# Altium PCB 剥皮器20200614.PCBDOC (part 1 of 2)
Units mil, origin at the board's own origin, x right, y up, seen from the top; angles counter-clockwise.
Board outline 5515.78 x 3626.02 mil, 4 copper layers (Top Layer, MidLayer1, MidLayer2, Bottom Layer); 100 components, 73 nets, 328 pads, 459 vias.
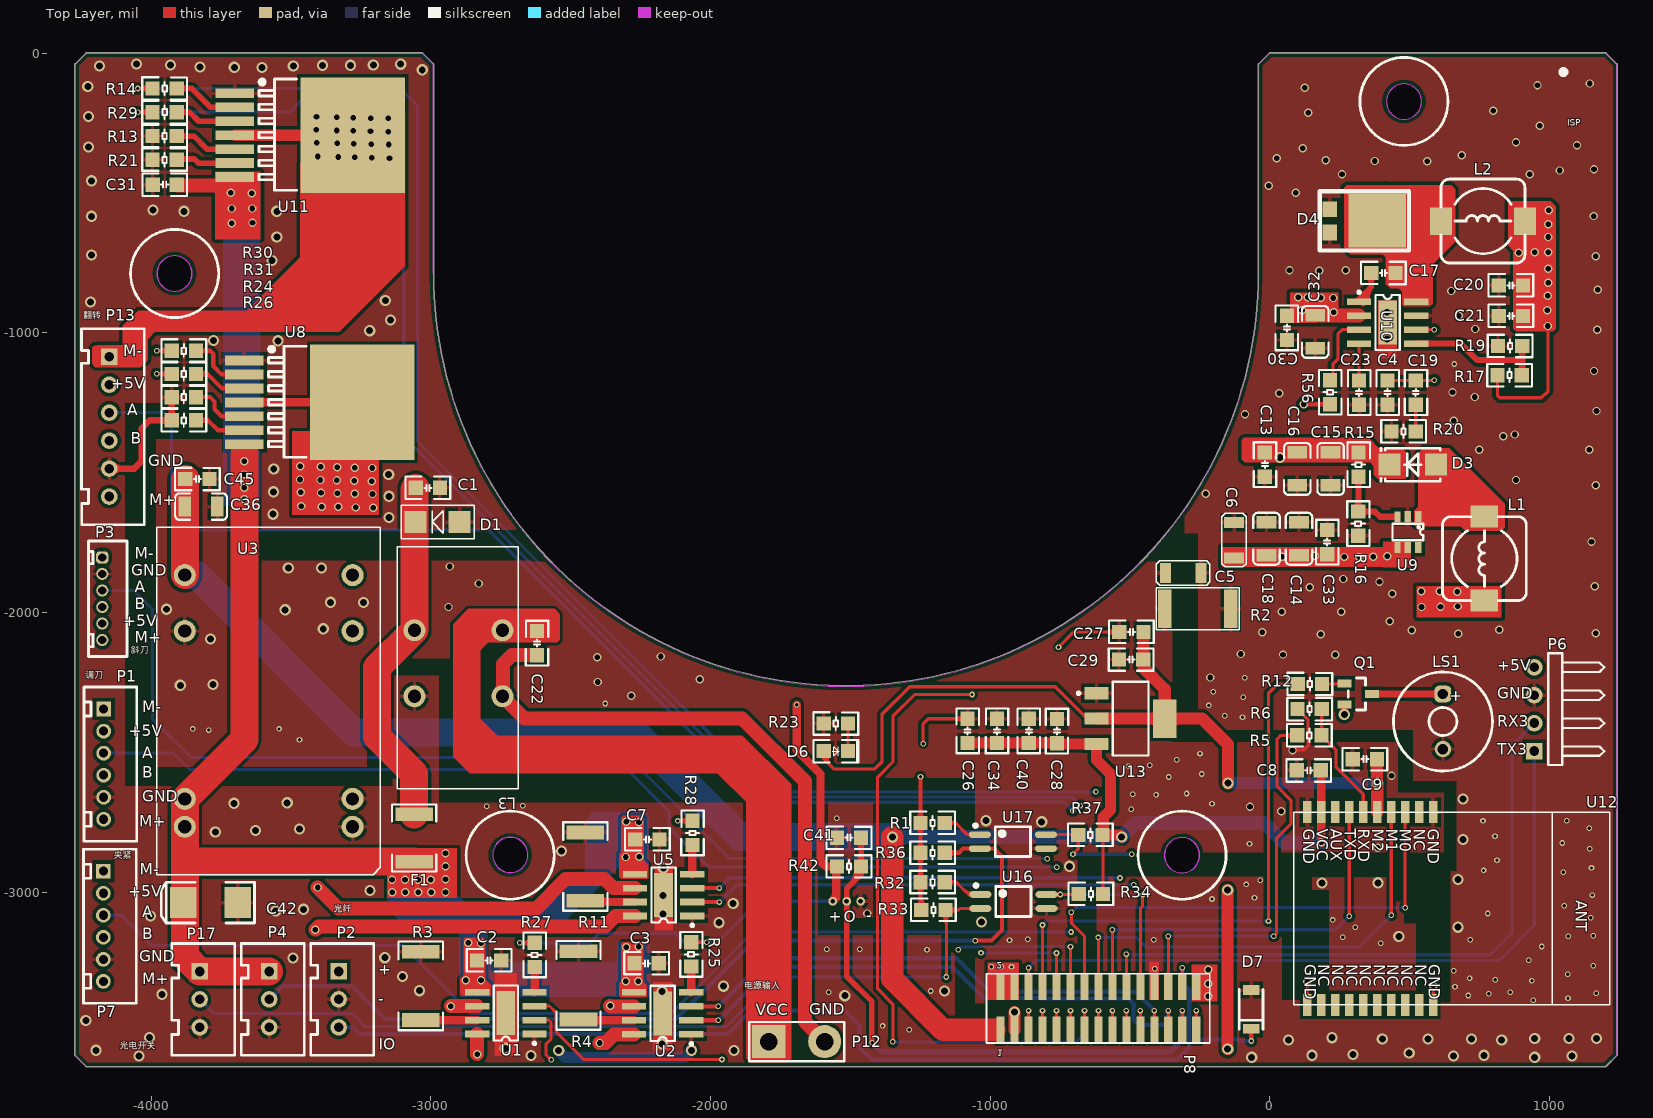
[diagram p0: Top Layer view]
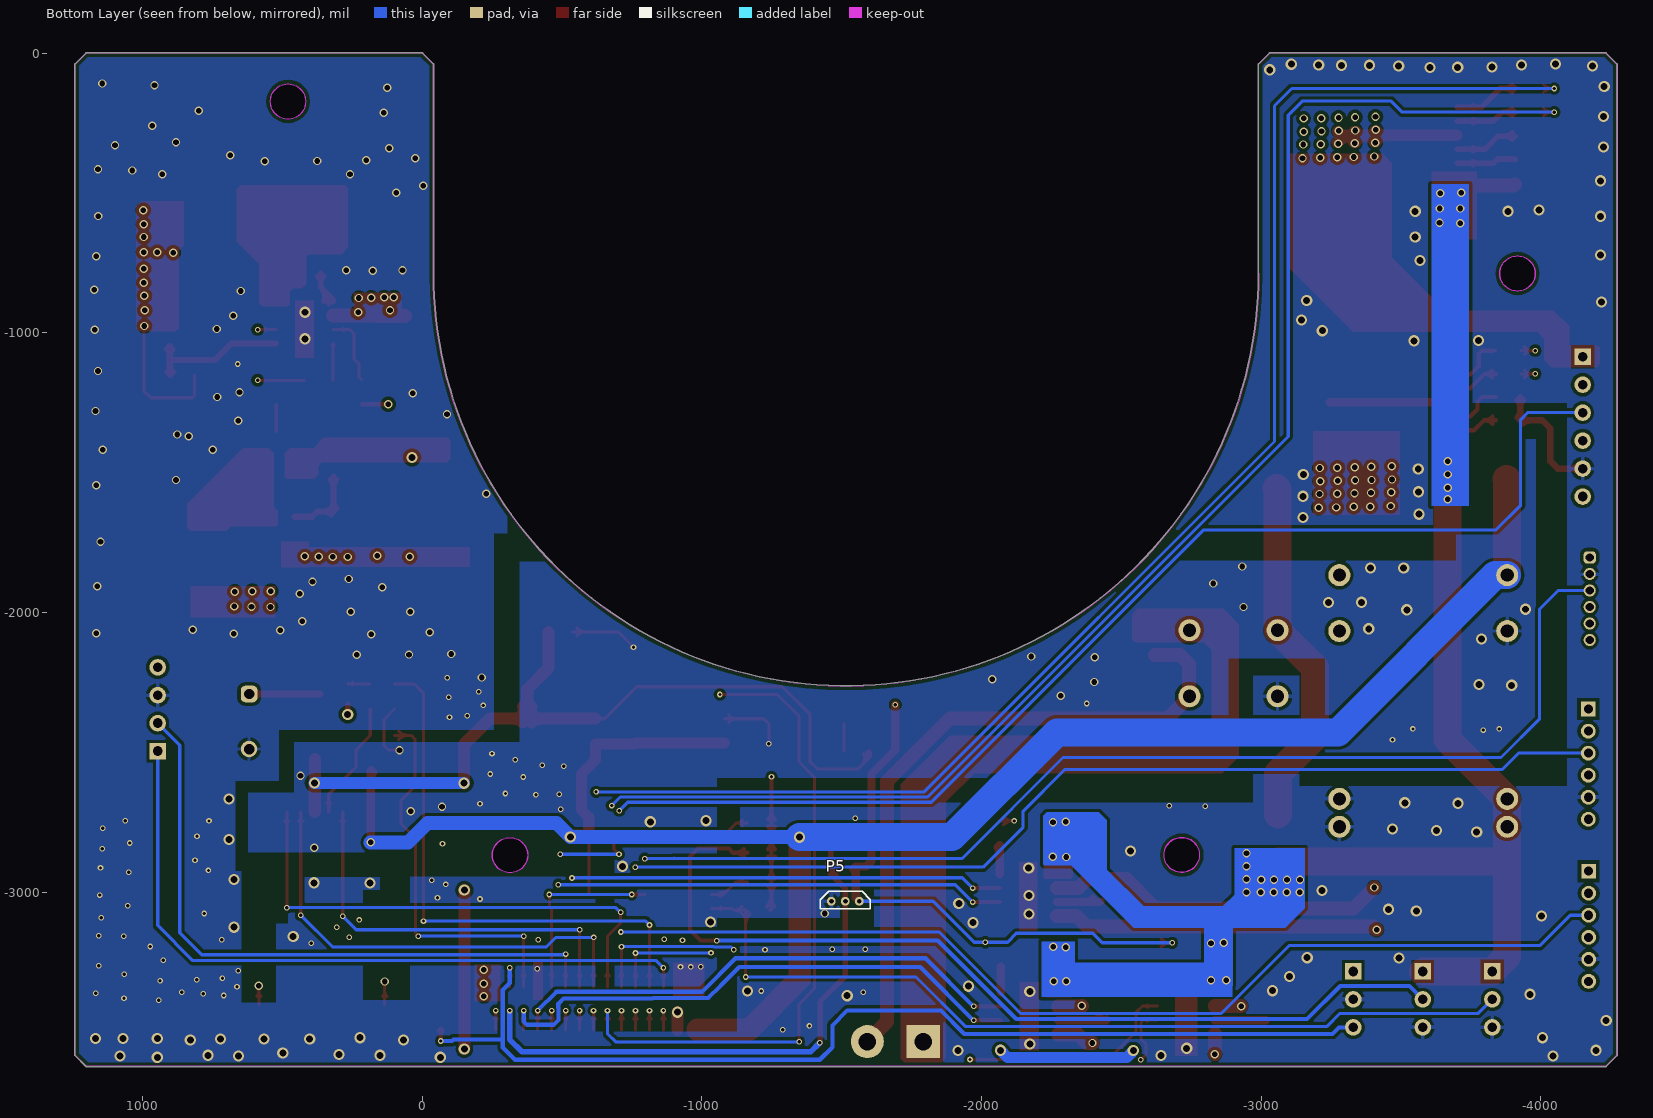
[diagram p1: Bottom Layer view, seen from below]
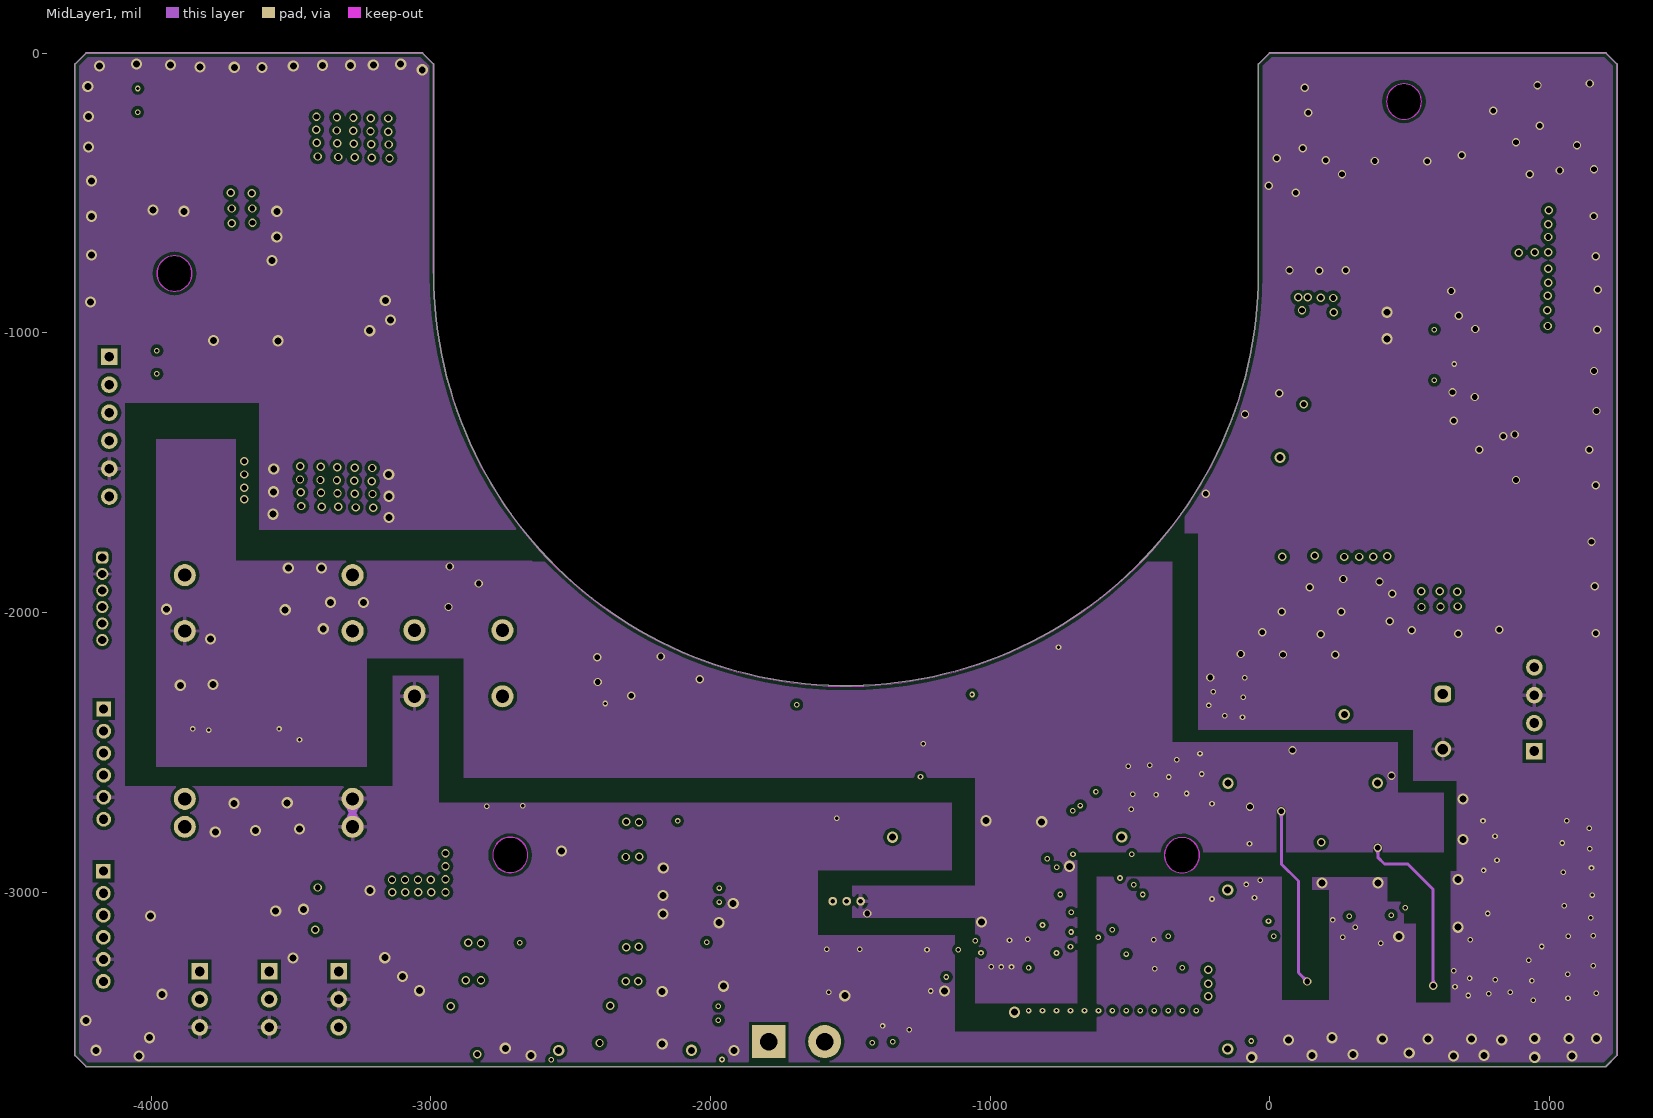
[diagram p2: MidLayer1]
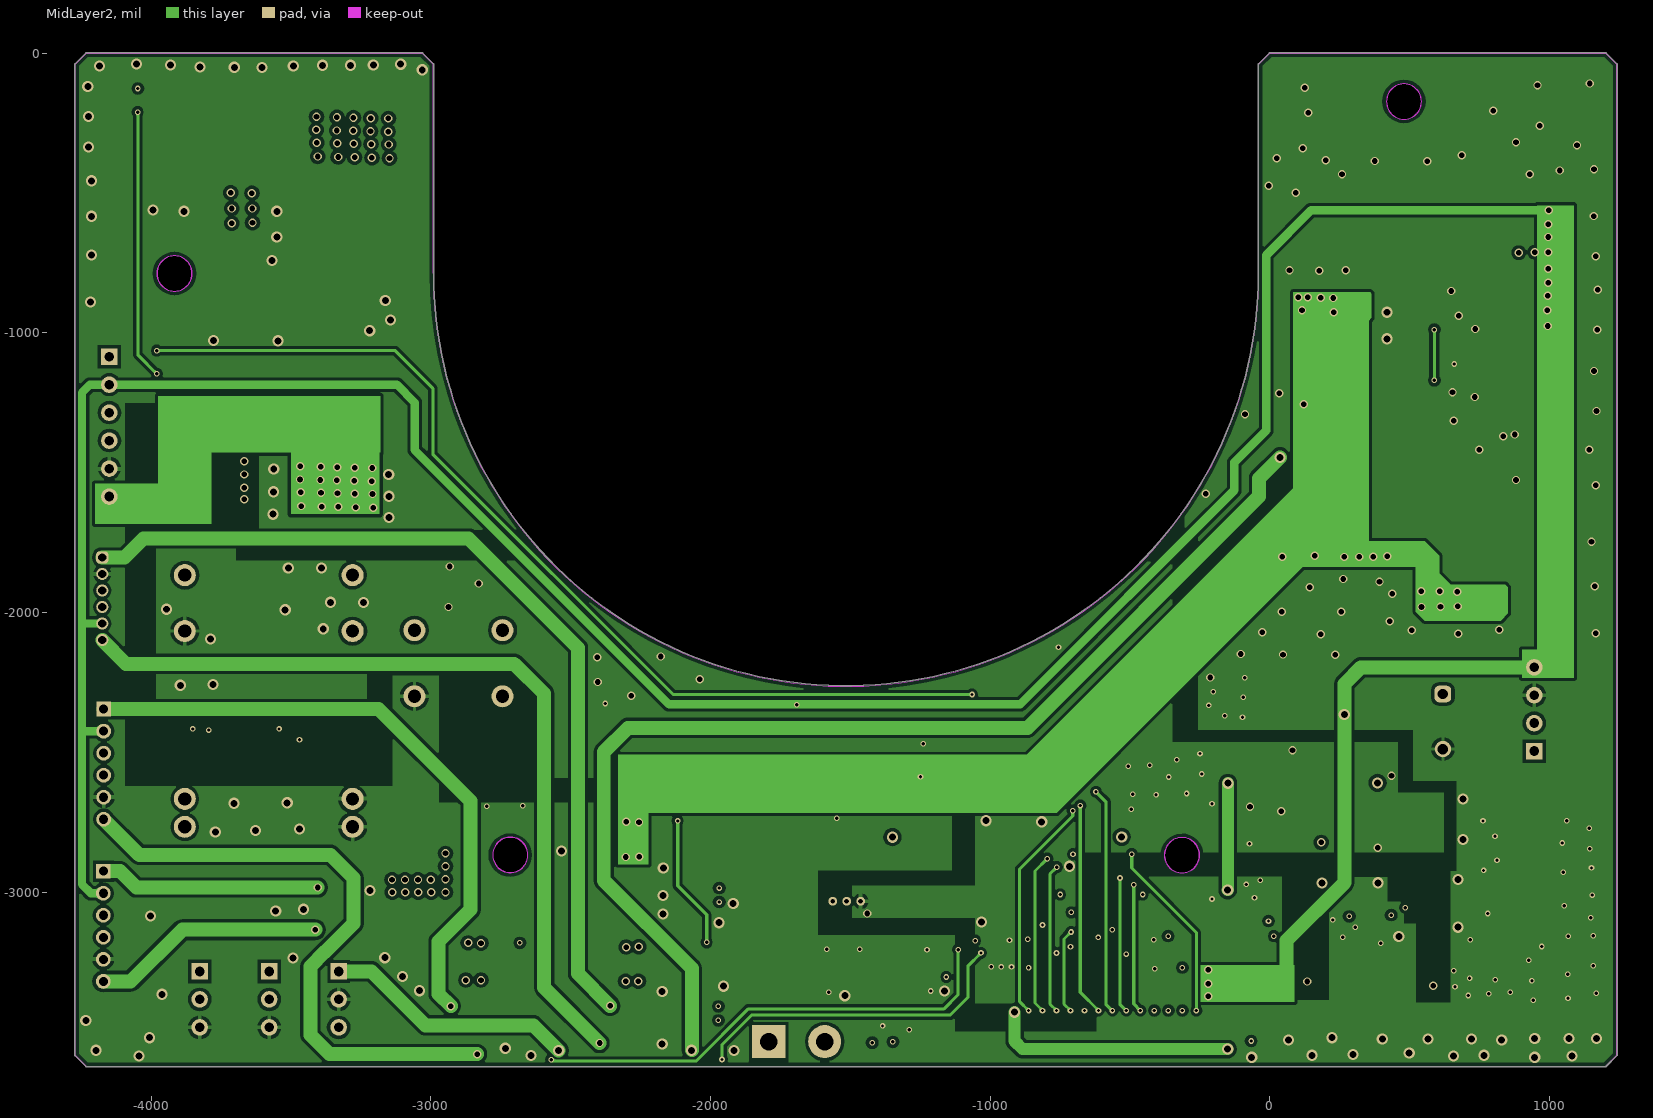
[diagram p3: MidLayer2]

## Layer stack, top to bottom
Top Layer: signal copper 1.4
Dielectric: core 12.6, FR-4, Dk 4.8
MidLayer1: signal copper 1.4
Dielectric: prepreg 12.6, FR-4, Dk 4.8
MidLayer2: signal copper 1.4
Dielectric: core 12.6, FR-4, Dk 4.8
Bottom Layer: signal copper 1.4

## Board outline
-4273.06,-3584.08 -4233.69,-3623.45 -4233.7,-3623.44 ccw(c-4232.29,-3622.05) -4232.29,-3624.03 1200.79,-3624.03 ccw(c1200.79,-3622.05) 1202.77,-3622.2 1241.56,-3583.4 1241.55,-3583.41 ccw(c1240.16,-3582) 1242.14,-3582 1242.14,-39.37 ccw(c1240.16,-39.37) 1241.55,-37.96 1241.56,-37.97 1202.19,1.4 1202.2,1.39 ccw(c1200.79,0) 1200.79,1.98 0,1.98 ccw(c0,0) -1.41,1.39 -1.4,1.4 -40.77,-37.97 -40.76,-37.96 ccw(c-39.37,-39.37) -41.35,-39.37 -41.35,-787.4 ccw(c-39.37,-787.4) -41.35,-787.42 cw(c-1515.75,-787.4) -2990.14,-787.4 -2990.14,-39.37 ccw(c-2992.13,-39.37) -2990.74,-37.96 -2990.73,-37.97 -3030.1,1.4 -3030.08,1.39 ccw(c-3031.5,0) -3031.5,1.98 -4232.29,1.98 ccw(c-4232.29,0) -4233.7,1.39 -4233.69,1.4 -4273.06,-37.97 -4273.05,-37.96 ccw(c-4271.66,-39.37) -4273.64,-39.37 -4273.64,-3582.68 ccw(c-4271.66,-3582.68)
cut-out: -376.97,-2867.23 ccw(c-313.98,-2867.23) -313.98,-2930.22 ccw(c-313.98,-2867.23) -250.98,-2867.23 ccw(c-313.98,-2867.23) -313.98,-2804.24 ccw(c-313.98,-2867.23)
cut-out: -3979.33,-787.4 ccw(c-3916.34,-787.4) -3916.34,-850.39 ccw(c-3916.34,-787.4) -3853.35,-787.4 ccw(c-3916.34,-787.4) -3916.34,-724.41 ccw(c-3916.34,-787.4)
cut-out: 416.56,-172.69 ccw(c479.55,-172.69) 479.55,-235.69 ccw(c479.55,-172.69) 542.55,-172.69 ccw(c479.55,-172.69) 479.55,-109.7 ccw(c479.55,-172.69)
cut-out: -2779.17,-2865.69 ccw(c-2716.17,-2865.69) -2716.17,-2928.68 ccw(c-2716.17,-2865.69) -2653.18,-2865.69 ccw(c-2716.17,-2865.69) -2716.17,-2802.7 ccw(c-2716.17,-2865.69)

## Design rules (kind name [scope] priority, off if disabled: settings)
Clearance Clearance_1 [InPolygon] p1: gap=12
Clearance [All] p2: gap=7.09
FabricationTestPointUsage TestPointUsage [All] p1: valid=0 allowmultiple=FALSE
FabricationTestpoint Testpoint [All] p1: side=3 testpointundercomponent=TRUE minsize=40 maxsize=100 preferedsize=60 minholesize=0 maxholesize=40 preferedholesize=32 testpointgrid=1 allowsidetop=TRUE allowsidebottom=TRUE usegrid=TRUE gridtolerance=0.01
PolygonConnect PolygonConnect_1 [IsVia] p1: connectstyle=Direct reliefconductorwidth=10 reliefentries=4 polygonreliefangle="90 Angle"
PolygonConnect [All] p2: connectstyle=Relief reliefconductorwidth=13.78 reliefentries=4 polygonreliefangle="90 Angle"
RoutingVias [All] p1: holewidth=28 width=50 viastyle="Through Hole" minholewidth=28 minwidth=50 maxholewidth=28 maxwidth=50
SilkscreenOverComponentPads [All] p1: minsilkscreentomaskgap=10
SolderMaskExpansion [All] p1: expansion=4
Width [All] p1: maxlimit=393.7 minlimit=3.94 preferedwidth=11.02
25 further rules are at their usual default settings.

## Components (designator, comment, footprint, x,y, rotation, side; value= is the part's Value field where it differs from the comment)
C1 "2.2uF/25V" 0805-C -3011,-1554 r0 top
C2 "104" 0805-C -2792,-3244 r0 top
C3 "104" 0805-C -2229,-3254 r0 top
C4 "22pF" 0805-C 420.69,-1213 r270 top
C5 "10nF/2KV" 1206C -374,-1858 r0 top
C6 "22uF/25V" 1206C -128,-1805 r90 top
C7 "104" 0805-C -2226,-2811 r0 top
C8 "104" 0805-C 139,-2564 r180 top
C9 "104" 0805-C 340,-2524 r180 top
C13 "104" 0805-C -18,-1471 r270 top
C14 "22uF/25V" 1206-C 104,-1736 r90 top
C15 "22uF/25V" 1206-C 217,-1486 r270 top
C16 "22uF/25V" 1206-C 98,-1486 r270 top
C17 "104" 0805-C 406,-786 r0 top
C18 "22uF/25V" 1206-C -12,-1736 r90 top
C19 "1.2nF" 0805-C 521.69,-1213 r270 top
C20 "47uF" 0805-C 862,-830 r0 top
C21 "47uF" 0805-C 862,-939 r0 top
C22 "2.2uF/25V" 0805-C -2621,-2109 r270 top
C23 "8.2nF" 0805-C 319,-1213 r270 top
C26 "47uF" 0805-C -1081,-2423 r270 top
C27 "47uF" 0805-C -495,-2069 r0 top
C28 "104" 0805-C -761,-2424 r90 top
C29 "104" 0805-C -496.43,-2167.63 r180 top
C30 "104" 0805-C 61,-982 r90 top
C31 "104" 0805-C -3951.8,-469.69 r180 top
C32 "22uF/25V" 1206-C 162,-996 r270 top
C33 "104" 0805-C 205,-1748 r270 top
C34 "47uF" 0805-C -976,-2423 r270 top
C36 "22uF/25V" 1206-C -3822,-1621 r0 top
C40 "104" 0805-C -862,-2423 r90 top
C41 "104" 0805-C -1505,-2805 r180 top
C42 "100uF" LC-CASE-C_6032 -3788.29,-3037.01 r180 top
C45 "104" 0805-C -3835,-1522 r180 top
D1 "SMAJ24CA" sma -2897,-1676 r180 top
D3 "SS34" "SMA - JW" 511,-1471 r0 top
D4 "SB1045L" TO-277 289.81,-599.07 r180 top
D6 "红色" 0805-LED -1552.28,-2495.18 r180 top
D7 "5.1V" LC-LL-34 -67,-3419 r90 top
F1 "1812 5A" LC-1812_R -3060,-2806 r90 top
L1 "4.7uH" 7*7*4电感 767,-1807 r90 top
L2 "6.8uh" 7*7*4电感 762,-600 r0 top
L3 "T22148" T181007 -2744,-2063 r270 top
LS1 "5V蜂鸣器" 蜂鸣器0905 618.82,-2389.46 r270 top
P1 "PH2.0-6PIN" PH2.0-6PIN -4169.99,-2542.12 r270 top
P2 "XH2.54-3PIN直" XH2.54-3PINֱ -3329.71,-3383.07 r270 top
P3 "ZH1.5-6PIN" ZH1.5-6PIN -4175.19,-1950.4 r270 top
P4 "XH2.54-3PIN直" XH2.54-3PINֱ -3578.2,-3383.07 r270 top
P5 "NC" 2SS52M -1463.19,-3032.07 r180 bottom locked
P6 "2.54弯单排针" HDR1X4H 945.35,-2495.46 r90 top
P7 "PH2.0-6PIN" PH2.0-6PIN -4171.51,-3121.6 r270 top
P8 "Header 15X2" SIP15-1.27 -613.19,-3415.07 r0 top locked
P12 "焊孔2MM" HDR1X2 -1792,-3534 r0 top
P13 "XH2.54-6PIN直" XH2.54-6PINֱ -4149.91,-1335.07 r270 top
P17 "XH2.54-3PIN直" XH2.54-3PINֱ -3826.69,-3383.07 r270 top
Q1 "S8550" SOT--23 315.81,-2291.07 r180 top
R1 "2K" 0805-R#1 -1206,-2752 r0 top
R2 "1M" 2512R -376,-1986 r0 top
R3 "0.1R 1%" 2512-R -3036.31,-3335 r270 top
R4 "0.35R 1%" 2512-R -2472.31,-3333 r270 top
R5 "2K" 0805-R#2 141,-2439 r180 top
R6 "3.3K" 0805-R#2 142,-2345 r0 top
R11 "0.1R 1%" 2512-R -2448,-2908 r270 top
R12 "2K" 0805-R#1 142.81,-2255.07 r180 top
R13 "1K" 0805-R#2 -3952.18,-296.01 r180 top
R14 "1K" 0805-R#1 -3952.18,-125.69 r180 top
R15 "30K" 0805-R#1 317,-1471 r270 top
R16 "1.2K" 0805-R#1 316,-1682 r270 top
R17 "10.2K" 0805-R#1 857,-1151 r180 top
R19 "2K" 0805-R#1 859,-1047 r0 top
R20 "44.2K" 0805-R#1 478,-1352 r0 top
R21 "1K" 0805-R#1 -3952.18,-380.69 r0 top
R23 "330R" 0805-R#1 -1552.28,-2396.18 r180 top
R24 "1K" 0805-R#2 -3883.61,-1229.5 r180 top
R25 "10K" 0805-R#1 -2069,-3222 r270 top
R26 "1K" 0805-R#1 -3883.61,-1312.5 r0 top
R27 "10K" 0805-R#1 -2629,-3224 r270 top
R28 "10K" 0805-R#1 -2065,-2788 r270 top
R29 "1K" 0805-R#2 -3952.18,-210.38 r0 top
R30 "1K" 0805-R#2 -3883.61,-1063.5 r180 top
R31 "1K" 0805-R#2 -3883.61,-1146.5 r180 top
R32 "2K" 0805-R#2 -1206,-2964 r180 top
R33 "10K" 0805-R#2 -1203,-3063 r180 top
R34 "10K" 0805-R#2 -640,-3006 r180 top
R36 "10K" 0805-R#2 -1206,-2859 r180 top
R37 "10K" 0805-R#2 -642,-2795 r180 top
R42 "10K" 0805-R#2 -1505,-2908 r180 top
R56 "10K" 0805-R#2 215,-1212 r90 top
U1 "DRV8872" SOP-8带散热#1 -2732.31,-3432 r90 top
U2 "DRV8872" SOP-8带散热#1 -2171.31,-3433 r90 top
U3 "URF2405P-6WR3" URF2405P-6WR3 -3880,-1866 r90 top
U5 "DRV8872" SOP-8带散热#1 -2168,-3010 r90 top
U8 "BTS7960" LC-TO-263-7 -3667,-1248 r180 top
U9 "SX1308" SOT-23-6 493,-1712 r180 top
U10 "TPS54531" SOP-8带散热#2 421,-963 r270 top
U11 "BTS7960" LC-TO-263-7 -3701,-293 r180 top
U12 "E28-2G4T12S" E28-2G4T12S 358.81,-3058.07 r270 top locked
U13 "AMS1117-3.3" SOT--223 -498,-2379 r180 top
U16 "IS281GB" LC-SOP-4_P1.27 -917,-3033 r0 top
U17 "IS281GB" LC-SOP-4_P1.27 -919,-2819 r0 top

## Footprints (in the part's own frame and the unit in brackets; to place one, negate y for a bottom-side part, rotate by r counter-clockwise, add the part's x,y. Pads: shape width x height; smd on the part's side, far side on the other; paste and mask are expansions set on the pad)
2SS52M [mm]
  round 0.8 hole 0.45: 1(0,0) 2(1.27,0) 3(2.54,0)
  silkscreen extent -0.99,-0.69 3.53,0.88
7*7*4电感 [mm] "7*7*4电感"
  rect 2x2.5 smd: 1(-3.81,0) 2(3.81,0)
  silkscreen extent -3.81,-3.81 3.81,3.81, body extent -3.65,-3.65 3.65,3.65, height 3.65
0805-C [mil] "0805贴片电容"
  rect 51x51 smd: 1(-43.31,0) 2(43.31,0)
  silkscreen extent -80,-40 80,41
0805-LED [mil] "0805LED"
  rect 51x51 smd: 1(43.31,0) 2(-43.31,0)
  silkscreen extent -81,-41 80,41
0805-R#1 [mil] "0805电阻"
  rect 51x51 smd: 1(-43.31,0) 2(43.31,0)
  silkscreen extent -80,-40 80,41
0805-R#2 [mil] "0805电阻"
  rect 51x51 smd: 1(43.31,0) 2(-43.31,0)
  silkscreen extent -80,-41 80,40
1206-C [mm]
  rect 1.13x1.8 smd: 1(-1.49,0) 2(1.49,0)
  silkscreen extent -2.36,-1.2 2.35,1.2, body extent -1.6,-0.81 1.6,0.79, height 1
1206C [mm]
  rect 1x1.8 smd: 1(0,0) 2(3.25,0)
  silkscreen extent -0.8,-1.1 4.05,1.1
2512-R [mm] "2512-R"
  rect 1.25x3.42 smd: 1(-3.1,0) 2(3.1,0)
  silkscreen extent -4.03,-2.01 4.02,2.01, body extent -3.16,-1.6 3.16,1.6, height 0.62
2512R [mm]
  rect 1.2x3.5 smd: 1(0,0) 2(6,0)
  silkscreen extent -0.75,-1.9 6.75,1.9
E28-2G4T12S [mm]
  rect 2x0.8 smd: 1(-8.75,5.715) 2(-8.75,4.445) 3(-8.75,3.175) 4(-8.75,1.905) 5(-8.75,0.635) 6(-8.75,-0.635) 7(-8.75,-1.905) 8(-8.75,-3.175) 9(-8.75,-4.445) 10(-8.75,-5.715) 11(8.75,-5.715) 12(8.75,-4.445) 13(8.75,-3.175) 14(8.75,-1.905) 15(8.75,-0.635) 16(8.75,0.635) 17(8.75,1.905) 18(8.75,3.175) 19(8.75,4.445) 20(8.75,5.715)
  silkscreen extent -8.76,-6.96 8.75,21.74
HDR1X2 [mm] "Connector; Header; 2 Position"
  rect 3x3 hole 1.6: 1(0,0)
  round 3 hole 1.6: 2(5.08,0)
  silkscreen extent -1.78,-1.78 6.86,1.78
HDR1X4H [mm] "Connector; Header; 4 Position; Right Angle"
  rect 1.5x1.5 hole 0.9: 1(0,0)
  round 1.5 hole 0.9: 2(2.54,0) 3(5.08,0) 4(7.62,0)
  silkscreen extent -1.27,-6.35 8.89,-1.27
LC-1812_R [mm]
  rect 1.2x3.42 smd: 1(-2.15,0) 2(2.15,0)
  silkscreen extent -3.05,-2.01 3.05,2.01, body extent -2.25,-1.6 2.25,1.6, height 0.59
LC-CASE-C_6032 [mm]
  rect 2.4x2.8 smd: 1(2.48,0) 2(-2.48,0)
  silkscreen extent -4.01,-1.85 4.47,1.85, body extent -3.05,-1.68 3.05,1.67, height 2.7
LC-LL-34 [mm]
  rect 0.9x1.5 smd: 1(1.75,0) 2(-1.75,0)
  silkscreen extent -1.8,-1.08 1.8,1.08
LC-SOP-4_P1.27 [mm]
  oval 2x0.6 smd: 1(-3,0.635) 2(-3,-0.635) 3(3,-0.635) 4(3,0.635)
  silkscreen extent -3.55,-1.35 1.6,1.6
LC-TO-263-7 [mm]
  rect 3.5x0.9 smd: 1(0,-3.81) 2(0,-2.54) 3(0,-1.27) 4(0,0) 5(0,1.27) 6(0,2.54) 7(0,3.81)
  rect 9.5x10.5 smd: 8(-10.7,0)
  silkscreen extent -5.6,-5.1 -2.2,5
PH2.0-6PIN [mm]
  rect 1.35x1.35 hole 0.82: 1(-5,0)
  round 1.35 hole 0.82: 2(-3,0) 3(-1,0) 4(1,0) 5(3,0) 6(5,0)
  silkscreen extent -7,-1.8 7,3
SIP15-1.27 [mm]
  rrect5% 0.74x2.4 smd: 1(-8.89,-1.95) 2(-8.89,1.95) 3(-7.62,-1.95) 4(-7.62,1.95) 5(-6.35,-1.95) 6(-6.35,1.95) 7(-5.08,-1.95) 8(-5.08,1.95) 9(-3.81,-1.95) 10(-3.81,1.95) 11(-2.54,-1.95) 12(-2.54,1.95) 13(-1.27,-1.95) 14(-1.27,1.95) 15(0,-1.95) 16(0,1.95) 17(1.27,-1.95) 18(1.27,1.95) 19(2.54,-1.95) 20(2.54,1.95) 21(3.81,-1.95) 22(3.81,1.95) 23(5.08,-1.95) 24(5.08,1.95) 25(6.35,-1.95) 26(6.35,1.95) 27(7.62,-1.95) 28(7.62,1.95) 29(8.89,-1.95) 30(8.89,1.95)
  silkscreen extent -10.16,-3.15 10.11,3.15
sma [mm]
  rect 2x2 smd: 1(0,0) 2(4,0)
  silkscreen extent -1.3,-1.5 5.3,1.5
"SMA - JW" [mm] "贴片4007"
  rect 2x2 smd: 1(2.1,0) 2(-2.1,0)
  silkscreen extent -2.89,-1.5 2.5,1.5
SOP-8带散热#1 [mm] "SOP-8带散热"
  rect 0.6x2.2 smd: 1(-1.905,-2.6) 2(-0.635,-2.6) 3(0.635,-2.6) 4(1.905,-2.6) 5(1.905,2.6) 6(0.635,2.6) 7(-0.635,2.6) 8(-1.905,2.6)
  rect 4x1.7 smd: 1(0,0)
  silkscreen extent -2.88,-2.72 2.5,1.1
SOP-8带散热#2 [mm] "SOP-8带散热"
  rect 0.6x2.2 smd: 1(-1.905,-2.6) 2(-0.635,-2.6) 3(0.635,-2.6) 4(1.905,-2.6) 5(1.905,2.6) 6(0.635,2.6) 7(-0.635,2.6) 8(-1.905,2.6)
  rect 4x1.7 smd: 7(0,0)
  silkscreen extent -2.88,-2.72 2.5,1.1
SOT-23-6 [mm] "DW01"
  rect 0.55x1 smd: 1(-0.95,-1.4) 2(0,-1.4) 3(0.95,-1.39) 4(0.95,1.4) 5(0,1.4) 6(-0.95,1.4)
  silkscreen extent -1.41,-0.75 1.4,0.75
SOT--23 [mm] "贴片三极管"
  rect 1.25x0.7 smd: 1(1.25,-0.95) 2(1.25,0.95) 3(-1.25,0)
  silkscreen extent -0.65,-1.46 0.9,1.46
SOT--223 [mm] "AMS1117"
  rect 2.15x1.1 smd: 1(3.1,-2.3) 2(3.1,0) 3(3.1,2.3)
  rect 2.15x3.5 smd: 2(-3.1,0)
  silkscreen extent -1.62,-3.35 4.85,3.35
T181007 [mm]
  round 2 hole 1.2: 1(0,0) 2(0,-8) 3(6,0) 4(6,-8)
  silkscreen extent -7.59,-9.58 14.41,1.42
TO-277 [mil]
  rect 50.8x56 smd: 1(76.1,-41.6) 1(76.1,41.6)
  rect 204.72x192 smd: 3(-94.49,0)
  silkscreen extent -208,-106 112,106
URF2405P-6WR3 [mm]
  round 2 hole 1.2: 2(-22.86,-15.24) 3(-20.32,-15.24) 9(-5.08,-15.24) 11(0,-15.24) 14(0,0) 16(-5.08,0) 22(-20.32,0) 23(-22.86,0)
  silkscreen extent -27.23,-17.77 4.37,2.53
XH2.54-3PINֱ [mm]
  rect 1.5x1.5 hole 0.88: 1(-2.54,0)
  round 1.5 hole 0.88: 2(0,0) 3(2.54,0)
  silkscreen extent -5.08,-2.54 5.07,3.18
XH2.54-6PINֱ [mm]
  rect 1.5x1.5 hole 0.88: 1(-6.35,0)
  round 1.5 hole 0.88: 2(-3.81,0) 3(-1.27,0) 4(1.27,0) 5(3.81,0) 6(6.35,0)
  silkscreen extent -8.89,-2.54 8.91,3.18
ZH1.5-6PIN [mm]
  rrect50% 1.1x1.1 hole 0.75: 1(-3.75,0)
  round 1.1 hole 0.75: 2(-2.25,0) 3(-0.75,0) 4(0.75,0) 5(2.25,0) 6(3.75,0)
  silkscreen extent -5.25,-1.25 5.25,2.25
蜂鸣器0905 [mm]
  rrect50% 1.5x1.5 hole 0.95: 1(-2.5,0)
  round 1.5 hole 0.95: 2(2.5,0)
  silkscreen extent -4.5,-4.5 4.5,4.5

## Part data
C1 C2 C3 C4 C7 C8 C9 C13 C17 C19 C20 C21 C22 C23 C26 C27 C30 C31 C33 C34 C41 C45: library part Cap, "Capacitor"
C5: library part C, "C"
C6 C14 C15 C16 C18 C28 C29 C32 C36 C40: library part CAP, "Capacitor"
C42: library part "Cap Pol2", "Polarized Capacitor (Axial)"
D1 D7: library part "D Zener", "Zener Diode"
D3: library part "Diode 1N4007", "1 Amp General Purpose Rectifier"
D4: library part "Diode 1N4001", "1 Amp General Purpose Rectifier"
D6: library part LED0, "Typical INFRARED GaAs LED"
F1: library part "Fuse 1", "Fuse"
L1 L2: library part Inductor, "Inductor"
L3: library part 共模电感
LS1: library part Bell, "Electrical Bell"
P1 P3 P7 P13: library part "Header 6", "Header, 6-Pin"
P2 P4 P5 P17: library part "Header 3", "Header, 3-Pin"
P6: library part "Header 4", "Header, 4-Pin"
P8: "Header, 15-Pin, Dual row"
P12: library part "Header 2", "Header, 2-Pin"
Q1: library part 2N3906, "PNP General Purpose Amplifier"
R1 R3 R4 R5 R6 R11 R12 R13 R14 R15 R16 R17 R19 R20 R21 R23 R24 R25 R26 R27 R28 R29 R30 R31 R32 R33 R34 R36 R37 R42 R56: library part Res2, "Resistor"
R2: library part Res1, "Resistor"
U1 U2 U5: library part 6N137, "6N137"
U12: library part E43-433T13S
U13: library part AS1117
U16 U17: library part TLP521-1

## Via types
v1: diameter 30, hole 20, Top Layer to Bottom Layer, tented both sides, 193 vias
v2: diameter 20, hole 12, Top Layer to Bottom Layer, tented both sides, 148 vias
v3: diameter 40, hole 25, Top Layer to Bottom Layer, tented both sides, 118 vias

## Nets (pads, with @x,y where several pads share a name; then routed paths per layer and width w, separated by ;. In a path a pad name is that pad's centre, name@x,y a point inside that pad or via, vN(x,y) a via of type N, cw(c..) or ccw(c..) an arc to the next point about the centre after c; other vN are vias at no path point)
+3.3V: C9.1 C27.2 C29.1 D6.1 P8.3 U12.5 U13.2 | length 5289.3
  Top Layer w12: D6.1@-1599.53,-2493.02 ccw(c-1577.57,-2505.03) -1595.27,-2522.73 ; D6.1@-1595.58,-2495.18 -1595.58,-2522.42 ; D6.1@-1589,-2498.78 ccw(c-1562.93,-2513.04) -1583.95,-2534.05 ; D6.1@-1578.48,-2504.54 ccw(c-1548.29,-2521.05) -1572.62,-2545.38 ; U13.2@-620.05,-2379 -653,-2379 -767.4,-2264.6 -1287.6,-2264.6 -1387,-2364 -1387,-2533 -1413,-2559 -1559,-2559 -1595.58,-2522.42 ; -1595.58,-2522.42 ccw(c-1604.85,-2522.42) -1601.87,-2513.64 cw(c-1604.85,-2522.42) -1595.58,-2522.42 ; -1595.58,-2522.42 cw(c-1586.31,-2522.42) -1589.3,-2513.64 ccw(c-1586.31,-2522.42) -1595.58,-2522.42
  Top Layer w43.31: P8.3@-913.19,-3491.84 -913.19,-3429.19 v3(-913,-3429) ; U13.2@-620.05,-2379 U13.2@-375.95,-2379 ; C27.2@-451.69,-2069 -451.69,-2198.31 -375.95,-2274.05 U13.2@-375.95,-2379 ; U13.2@-390.57,-2393.62 ccw(c-425.85,-2428.9) -425.85,-2379 ccw(c-425.85,-2329.1) U13.2@-390.57,-2364.38 ; U13.2@-390.57,-2337.81 ccw(c-425.85,-2302.53) -375.95,-2302.53 ccw(c-326.05,-2302.52) U13.2@-361.34,-2337.81 ; U13.2@-361.34,-2393.62 cw(c-326.05,-2428.9) -326.05,-2379 cw(c-326.05,-2329.1) U13.2@-361.34,-2364.38 ; v3(-151,-2992) v3(-151,-3561) v3@-150,-3560 ; v3(-150,-2610) -150,-2472 -243,-2379 U13.2@-375.95,-2379 ; C9.1@383.31,-2524 383.31,-2609.69 v3@383.81,-2610.19 ; U12.5@383.81,-2713.58 v3@383.81,-2610.19 ; v3(385,-2609) v3@383.81,-2610.19
  MidLayer2 w43.31: v3(-913,-3429) -913,-3532 -884,-3561 v3(-151,-3561) ; v3(-151,-2992) -150,-2991 v3(-150,-2610)
  Bottom Layer w43.31: v3@-150,-2609 v3(385,-2609)
+5V: C20.2 C21.2 L2.2 P1.2 P3.5 P5.3 P6.4 P7.2 P8.30 P13.2 Q1.2 R17.2 R25.1 R27.1 R28.1 R42.1 | length 14428.6
  Top Layer w12: v2(-2682,-3181) -2681.69,-3180.69 R27.1@-2629,-3180.69 ; v2@-2679.17,-3183.83 cw(c-2671.6,-3191.4) -2671.6,-3180.69 ; R27.1@-2642.79,-3194.48 ccw(c-2676.08,-3227.77) -2676.08,-3180.69 ccw(c-2676.08,-3133.62) R27.1@-2642.79,-3166.9 ; v2(-2118,-2745) -2117.69,-2744.69 R28.1@-2065,-2744.69 ; v2@-2115.17,-2747.83 cw(c-2107.6,-2755.4) -2107.6,-2744.69 ; R28.1@-2078.79,-2758.48 ccw(c-2112.08,-2791.77) -2112.08,-2744.69 ccw(c-2112.08,-2697.62) R28.1@-2078.79,-2730.9 ; R25.1@-2067,-3179 -2014.31,-3179 v2(-2014,-3178.69) ; -2024.4,-3179 ccw(c-2024.4,-3168.29) v2@-2016.83,-3175.86 ; R17.2@813.69,-1151 813.69,-1223.69 822,-1232 971,-1232 994.68,-1208.32 v1@994.68,-975 ; v1@986.64,-981.36 cw(c967.22,-1000.78) 994.68,-1000.78 ; 994.68,-992.68 cw(c1010.68,-992.68) v1@999.36,-981.36
  Top Layer w20: v3@258.93,-2356.93 ccw(c240.42,-2338.42) Q1.2@266.6,-2338.42 ; v3(266,-2364) 266.6,-2363.4 Q1.2@266.6,-2328.47 ; Q1.2@266.6,-2341.3 ccw(c288.7,-2341.3) v3@273.07,-2356.93
  Top Layer w30: v2(-1692,-2329) -1692,-2492 -1607,-2577 -1607,-2889 -1588,-2908 R42.1@-1548.31,-2908 -1551.02,-2910.72 -1551.02,-3019.91 P5.3@-1563.19,-3032.07 ; P5.3@-1563.72,-3031.54 ccw(c-1594.37,-3000.9) -1551.02,-3000.9 ; -1551.02,-2939.91 cw(c-1516.4,-2939.91) R42.1@-1540.88,-2915.42
  MidLayer2 w12: v2(-2118,-2745) -2118,-2977 -2014,-3081 v2(-2014,-3178.69)
  MidLayer2 w30: P7.2@-4179.7,-3011.67 ccw(c-4199.46,-3031.43) -4199.46,-3003.49 ccw(c-4199.46,-2975.55) P7.2@-4179.7,-2995.31 ; P1.2@-4178.17,-2432.19 ccw(c-4197.93,-2451.95) -4197.93,-2424.01 ccw(c-4197.93,-2396.07) P1.2@-4178.17,-2415.83 ; P3.5@-4175.19,-2038.99 -4247.59,-2038.99 ; P7.2@-4171.51,-3003.49 -4216.11,-3003.49 -4247.6,-2972 -4247.6,-2424 ; P1.2@-4169.99,-2424.01 -4247.59,-2424.01 ; P13.2@-4140.99,-1194 P13.2@-4149.91,-1185.07 ; v1(997,-561) 148,-561 -13.11,-722.11 -13.11,-1348.65 -127.47,-1463 -127.47,-1562.47 -893,-2328 -2148,-2328 -3058,-1418 -3058,-1249 -3121.93,-1185.07 P13.2@-4149.91,-1185.07 ; -4247.6,-2424 -4247.6,-2039 ; -4247.6,-2039 -4247.6,-1213.6 -4219.07,-1185.07 P13.2@-4149.91,-1185.07
  MidLayer2 w50: 60,-3296 60,-3172 266,-2966 v3(266,-2364) 266,-2255.07 325.61,-2195.46 P6.4@945.35,-2195.46
  Bottom Layer w12: v2(-2682,-3181) -2432,-3181 -2398,-3147 -2125,-3147 -2093.31,-3178.69 v2(-2014,-3178.69) -1973.69,-3178.69 -1827.07,-3032.07 P5.3@-1563.19,-3032.07 ; P5.3@-1570.08,-3038.97 ccw(c-1586.72,-3055.61) -1586.72,-3032.07 ccw(c-1586.72,-3008.54) P5.3@-1570.08,-3025.18
  other v1: -221,-3372 -221,-3327 -221,-3277 993,-975 992,-919 993,-867 995,-820 995,-770 890,-713 947,-711 996,-711 995,-657 996,-611
+5VV: C8.1 C26.2 C28.1 C34.2 C36.1 C40.1 C45.2 P8.1 R34.2 R37.2 U3.14 U12.9 U13.3 | length 7394.7
  Top Layer w12: R34.2@-596.69,-3006 -596.69,-2795 -596.69,-2793 R37.2@-596,-2792.31
  Top Layer w30: C8.1@174.88,-2571.42 cw(c153.33,-2592.98) 183.81,-2592.98 ; C8.1@182.31,-2564 183.81,-2565.5 U12.9@183.81,-2713.58 v1(183.81,-2821.81) v1@185,-2823
  Top Layer w40: C26.2@-1081,-2466.31 C40.1@-862,-2466.31 -762,-2466.31 -758.76,-2469.55 U13.3@-620.05,-2469.55 -620.05,-2526.95 -569.5,-2577.5 -569.5,-2705.5 -596,-2732 R37.2@-596,-2792.31 ; R37.2@-596.69,-2793 R37.2@-598.69,-2795 -596.69,-2795 -537,-2795 v3(-530,-2802)
  Top Layer w80: v3(-1350,-2803) -1350,-3310 -1168.16,-3491.84 -984.84,-3491.84
  Top Layer w100: U3.14@-3880,-1866 -3880,-1523.69 C45.2@-3878.31,-1522
  Bottom Layer w50: v3(-1350,-2803) -807,-2803 ; -595,-2803 -807,-2803 ; v1(183.81,-2821.81) 49.81,-2821.81 -19,-2753 -481,-2753 v3(-530,-2802) -531,-2803 -807,-2803
  Bottom Layer w100: U3.14@-3880,-1866 -3837,-1866 -3275,-2428 -2270,-2428 -1895,-2803 v3(-1350,-2803)
+15V: C13.1 C15.1 C16.1 D3.2 P2.1 R15.1 | length 5478.4
  MidLayer2 w50: P2.1@-3329.71,-3283.07 -3211.93,-3283.07 -3019,-3476 -2633.48,-3476 v3@-2543.24,-3566.24 ; v3@-2067,-3564 -2067,-3273 ; -2067,-3272 -2067,-3273 ; v3(36,-1445) -39,-1520 -39,-1584 -867,-2412 -2295,-2412 -2382,-2499 -2382,-2958 -2067,-3273
  Bottom Layer w40: v3@-2535.44,-3574.04 -2535.44,-3575.56 -2520,-3591 -2094,-3591 v3(-2068,-3565)
  other v3: -2543,-3566
ADC8_IN: D7.2 P2.3 P8.28 | length 3945.4
  Top Layer w11.02: P8.28@-319.59,-3299.22 ccw(c-335.05,-3283.76) -313.19,-3283.76 ccw(c-291.33,-3283.76) P8.28@-306.79,-3299.22 ; v2@-316.17,-3272.63 cw(c-323.38,-3279.83) -313.19,-3279.83 ; P8.28@-313.19,-3338.3 v2@-313.19,-3269.65 ; -313.19,-3280.75 cw(c-301.71,-3280.75) v2@-309.83,-3272.63
  Top Layer w15: D7.2@-74.22,-3495.12 cw(c-91.66,-3512.56) -67,-3512.56 cw(c-42.34,-3512.56) D7.2@-59.78,-3495.12 ; v2(-67,-3532) D7.2@-67,-3487.9
  Bottom Layer w15: P2.3@-3329.71,-3483.07 -3278.34,-3483.07 -3255,-3506.41 -1938.41,-3506.41 -1855,-3423 -1520,-3423 -1467,-3476 -1467,-3554 -1422,-3599 -332,-3599 -288.41,-3555.41 -288.41,-3528 ; v2@-313.19,-3269.65 -313.19,-3324.81 -288.41,-3349.59 -288.41,-3528 ; v2(-67,-3532) -106.41,-3532 -112,-3526.41 -286.83,-3526.41 -288.41,-3528
  other v2: -313,-3269.46
AGND: C5.1 C8.2 C9.2 C26.1 C27.1 C28.2 C29.2 C34.1 C36.2 C40.2 C45.1 P5.1 P8.2 P8.4 R2.1 R6.2 R23.2 U3.16 U12.1 U12.10 U12.11 U12.20 U13.1 U16.3 U17.3 | length 2623.8
  Top Layer w11.02: v2@-1243.17,-2465.83 ccw(c-1250.84,-2458.16) -1240,-2458.16 ccw(c-1229.16,-2458.16) v2@-1236.83,-2465.83 ; v2(-1240,-2469) -1240,-2398 -1221.69,-2379.69 C26.1@-1081,-2379.69 ; C26.1@-1095.13,-2393.83 ccw(c-1129.26,-2427.95) -1129.26,-2379.69 ccw(c-1129.26,-2331.44) C26.1@-1095.13,-2365.56 ; v2(-756,-2124) -701,-2069 C27.1@-538.31,-2069 ; v2@-756,-2119.51 ccw(c-756,-2108.68) -748.34,-2116.34 ccw(c-740.68,-2124) v2@-751.51,-2124 ; C27.1@-552.44,-2083.13 ccw(c-586.56,-2117.26) -586.56,-2069 ccw(c-586.56,-2020.74) C27.1@-552.44,-2054.87 ; v1(81,-2492) 120,-2492 135.79,-2476.21 135.79,-2382.1 R6.2@98.69,-2345 ; v1@87.71,-2498.71 cw(c103.91,-2514.91) 103.91,-2492 cw(c103.91,-2469.09) v1@87.71,-2485.29 ; U12.11@126.57,-3371.7 ccw(c109.1,-3354.23) 133.81,-3354.23 ccw(c158.52,-3354.23) U12.11@141.05,-3371.7 ; v1@127.1,-3325.9 cw(c110.9,-3342.1) 133.81,-3342.1 cw(c156.72,-3342.1) v1@140.52,-3325.9 ; U12.11@133.81,-3402.56 v1(133.81,-3319.19) v1@134,-3319 ; U12.20@576.57,-3371.7 ccw(c559.1,-3354.23) 583.81,-3354.23 ccw(c608.52,-3354.23) U12.20@591.05,-3371.7 ; v1@577.1,-3340.9 cw(c560.9,-3357.1) 583.81,-3357.1 cw(c606.72,-3357.1) v1@590.52,-3340.9 ; U12.20@583.81,-3402.56 v1(583.81,-3334.19) v1@584,-3334
  MidLayer1 w11.02: v1@34.29,-2717.71 cw(c18.09,-2733.91) 41,-2733.91 cw(c63.91,-2733.91) v1@47.71,-2717.71 ; v1(41,-2711) 41,-2899 102,-2960 102,-3287.38 v1(133.81,-3319.19) ; v1@124.32,-3319.19 ccw(c101.42,-3319.19) 117.61,-3302.99 ccw(c133.81,-3286.79) v1@133.81,-3309.7 ; v1@379.29,-2847.71 cw(c363.09,-2863.91) 386,-2863.91 cw(c408.91,-2863.91) v1@392.71,-2847.71 ; v1(386,-2841) 386,-2875 410,-2899 493,-2899 583.81,-2989.81 v1(583.81,-3334.19) ; v1@577.1,-3327.48 ccw(c560.9,-3311.28) 583.81,-3311.28 ccw(c606.72,-3311.28) v1@590.52,-3327.48
  other v1: -1440,-3076 -71,-2694 435,-2583 -2283,-2298 -2403,-2248 -2039,-2239 -2405,-2159 -2178,-2157 -2937,-1980 -2829,-1896 -2933,-1835
  other v2: -961,-3267 -924,-3267 -997,-3266 -931,-3171 -866,-3168 -73,-2827 -496,-2703 -207,-2684 -407,-2651 -490,-2649 -298,-2647 -362,-2588 -244,-2577 -507,-2549 -430,-2546 -333,-2526 -250,-2504 -3470,-2455 -3795,-2420 -3852,-2416 -3543,-2416 -2377,-2325
  other v3: -1031,-3106 -717,-2907 -816,-2748 -1015,-2744 -3896,-2260 -3779,-2257 -3788,-2094 -3385,-2058 -3521,-1990 -3946,-1988 -3241,-1964 -3359,-1963 -3510,-1841 -3391,-1841
EGND: C22.2 L3.3 P12.2 | length 2450
  Top Layer w50: L3.3@-2754.16,-2289.06 ccw(c-2783.52,-2259.7) -2742,-2259.7 ; C22.2@-2621,-2152.31 -2710.31,-2152.31 -2742,-2184 -2742,-2297.22 L3.3@-2744,-2299.22 -2665.22,-2378 -1888,-2378 -1663,-2603 -1663,-3463 P12.2@-1592,-3534
GND: C1.2 C2.2 C3.2 C4.2 C5.2 C6.2 C7.2 C13.2 C14.2 C15.2 C16.2 C18.2 C20.1 C21.1 C23.2 C30.1 C31.2 C32.2 C33.1 C41.2 C42.2 D1.1 D4.1 D7.1 L3.4 LS1.2 P1.5 P2.2 P3.2 P4.3 P6.3 P7.5 P8.24 P13.5 P17.3 R2.2 R3.1 R4.1 R11.1 R13.1 R16.2 R19.1 R20.1 R21.1 R24.1 R26.1 U1.1 U2.1 U3.2 U3.3 U5.1 U8.1 U9.2 U10.7 U11.1 | length 978
  Top Layer w23.62: P13.5@-4149.91,-1485.07 -4061.07,-1485.07 -4034,-1458 -4034,-1341 -4005.5,-1312.5 R26.1@-3926.92,-1312.5 R24.1@-3926.92,-1229.5 ; P13.5@-4137.39,-1497.6 cw(c-4107.14,-1527.84) -4107.14,-1485.07 cw(c-4107.14,-1442.3) P13.5@-4137.39,-1472.55 ; R26.1@-3936.6,-1322.18 ccw(c-3959.97,-1345.55) -3959.97,-1312.5 ccw(c-3959.97,-1279.45) -3936.6,-1302.82 ccw(c-3959.97,-1279.45) -3926.92,-1279.45 ccw(c-3893.87,-1279.45) R26.1@-3917.24,-1302.82 ; R24.1@-3936.6,-1239.18 cw(c-3959.97,-1262.55) -3926.92,-1262.55 cw(c-3893.87,-1262.55) R24.1@-3917.24,-1239.18
  MidLayer1 w23.62: U3.2@-3299.49,-2746.51 ccw(c-3346.53,-2699.47) -3280,-2699.47 ccw(c-3213.47,-2699.47) U3.2@-3260.51,-2746.51 ; U3.3@-3299.49,-2685.49 cw(c-3346.53,-2732.53) -3280,-2732.53 cw(c-3213.47,-2732.53) U3.3@-3260.51,-2685.49 ; U3.2@-3280,-2766 U3.3@-3280,-2666
  other v1: -213,-2232 234,-2151 47,-2150 -104,-2148 182,-2077 674,-2075 1165,-2074 -28,-2070 507,-2063 820,-2061 429,-2031 43,-1997 255,-1997 438,-1933 143,-1910 1162,-1906 392,-1890 262,-1880 1150,-1746 -230,-1575 1165,-1544 880,-1526 1142,-1418 749,-1417 834,-1370 875,-1363 657,-1314 -89,-1291 1168,-1279 732,-1229 33,-1216 653,-1212 1159,-1136 1170,-988 734,-986 675,-938 649,-850 1173,-846 176,-778 70,-776 271,-776 1165,-726 1158,-582 92,-498 -4,-473 258,-433 929,-432 1037,-419 1159,-414 563,-386 375,-385 200,-383 24,-376 686,-365 117,-340 1098,-329 880,-318 965,-259 137,-213 799,-206 125,-123 957,-114 1144,-108
  other v2: -1290,-3491 -1385,-3478 942,-3386 1066,-3379 709,-3369 782,-3363 1167,-3361 860,-3358 -1578,-3357 -1213,-3353 662,-3338 937,-3317 806,-3313 714,-3308 1065,-3293 658,-3281 -412,-3274 1156,-3263 926,-3243 -1226,-3205 -1585,-3204 -1466,-3204 972,-3194 396,-3182 -415,-3170 717,-3170 260,-3161 1067,-3157 1156,-3156 305,-3125 225,-3099 1147,-3091 779,-3076 1052,-3048 -207,-3024 -55,-3020 1153,-3010 -84,-2972 -34,-2957 1049,-2928 764,-2922 1150,-2913 812,-2886 1144,-2845 1046,-2824 805,-2800 1142,-2771 762,-2745 1062,-2744 -1549,-2735 -2800,-2692 -2672,-2691 -98,-2374 -162,-2369 -218,-2332 -95,-2303 -203,-2283 -90,-2233 659,-1111
  other v3: -65,-3590 947,-3590 -4044,-3585 656,-3585 1080,-3585 -2642,-3584 151,-3583 766,-3583 297,-3580 498,-3575 -1916,-3566 -4198,-3565 -2734,-3558 -2173,-3543 66,-3528 829,-3528 402,-3525 565,-3525 721,-3525 947,-3523 1070,-3523 1168,-3523 -4006,-3520 222,-3520 -4234,-3458 -1520,-3370 -3962,-3365 -2173,-3355 -1163,-3353 -3041,-3352 -1954,-3336 -3102,-3301 -3493,-3235 -3165,-3234 461,-3158 673,-3125 -1970,-3109 -4003,-3085 -2170,-3078 -3555,-3067 -3456,-3061 -1919,-3040 -2170,-3012 -3218,-2994 186,-2967 387,-2966 673,-2954 -2169,-2913.58 -2533,-2853 690,-2811 -3771,-2784 -3627,-2779 -3470,-2774 -3704,-2682 -3514,-2680 690,-2667 -3150,-1660 -3565,-1648 -3150,-1584 -3563,-1568 -3151,-1506 -3562,-1486 -3547,-1028 -3777,-1027 419,-1021 -3219,-992 -3145,-954 419,-926 -4217,-889 -3163,-884 -3568,-741 -4214,-721 -3551,-657 -4214,-583 -3883,-565 -3551,-565 -3994,-560 -4214,-456 -4224,-335 -4224,-226 -4227,-119 -3031,-59 -3604,-51 -3703,-50 -3826,-49 -3492,-46 -4185,-45 -3388,-43 -3287,-43 -3931,-42 -3206,-42 -3108,-39 -4053,-38
IN1: P8.17 R14.2 | length 6278.9
  Top Layer w11.02: v2@-4050,-126 -4049.69,-125.69 R14.2@-3995.49,-125.69 ; v2@-4044.83,-129.17 cw(c-4036.42,-137.58) -4036.42,-125.69 ; v2@-4044.83,-122.83 ccw(c-4037.91,-115.91) -4037.91,-125.69 ; R14.2@-4009.62,-139.83 ccw(c-4043.74,-173.95) -4043.74,-125.69 ccw(c-4043.74,-77.44) R14.2@-4009.62,-111.56 ; P8.17@-569.59,-3452.76 ccw(c-585.05,-3437.31) -563.19,-3437.31 ccw(c-541.33,-3437.31) P8.17@-556.79,-3452.76 ; v2@-566.17,-3426.17 cw(c-573.38,-3433.38) -563.19,-3433.38 ; P8.17@-563.19,-3491.84 -563.19,-3423.19 v2(-563,-3423) ; -563.19,-3434.29 cw(c-551.71,-3434.29) v2@-559.83,-3426.17
  MidLayer2 w12: v2(-622,-2641) -586.28,-2676.72 -586.28,-3121 -586.28,-3143.75 -586.09,-3143.94 -586.09,-3399.91 v2(-563,-3423)
  Bottom Layer w11.02: v2(-4048,-126) -3110,-126 -3048,-188 -3048,-1388 -1795,-2641 v2(-622,-2641) ; v2@-4044.83,-129.17 cw(c-4037.16,-136.84) -4037.16,-126 cw(c-4037.16,-115.16) v2@-4044.83,-122.83 ; v2@-625.17,-2644.17 ccw(c-632.84,-2651.84) -632.84,-2641 ccw(c-632.84,-2630.16) v2@-625.17,-2637.83
IN2: P8.13 R30.1 | length 6236.9
  Top Layer w11.02: v2@-3981.92,-1063.5 -3981.61,-1063.19 R30.1@-3927.41,-1063.19 ; v2@-3976.75,-1066.67 cw(c-3968.34,-1075.08) -3968.34,-1063.19 ; v2@-3976.75,-1060.33 ccw(c-3969.83,-1053.41) -3969.83,-1063.19 ; v2@-3975.92,-1063.19 cw(c-3975.92,-1112.5) R30.1@-3941.06,-1077.63 ; v2@-3974.44,-1063.19 ccw(c-3974.44,-1015.99) R30.1@-3941.06,-1049.37 ; v2@-1351.17,-3531.83 ccw(c-1358.84,-3524.16) -1348,-3524.16 ccw(c-1337.16,-3524.16) v2@-1344.83,-3531.83 ; v2(-1348,-3535) -1348,-3400 -1402.6,-3345.4 -1402.6,-2588.6 -1348,-2534 -1348,-2371 -1270,-2293 v2(-1065,-2293) ; v2@-1068.17,-2296.17 ccw(c-1075.84,-2303.84) -1075.84,-2293 ccw(c-1075.84,-2282.16) v2@-1068.17,-2289.83 ; P8.13@-669.59,-3452.76 ccw(c-685.05,-3437.31) -663.19,-3437.31 ccw(c-641.33,-3437.31) P8.13@-656.79,-3452.76 ; v2@-666.17,-3426.17 cw(c-673.38,-3433.38) -663.19,-3433.38 ; P8.13@-663.19,-3491.84 -663.19,-3423.19 v2(-663,-3423) ; -663.19,-3434.29 cw(c-651.71,-3434.29) v2@-659.83,-3426.17
  MidLayer2 w11.02: v2(-3979.92,-1063.5) -3127.5,-1063.5 -2993,-1198 -2993,-1434 -2134,-2293 v2(-1065,-2293) ; v2@-3976.75,-1066.67 cw(c-3969.09,-1074.34) -3969.09,-1063.5 cw(c-3969.09,-1052.66) v2@-3976.75,-1060.33 ; v2@-1068.17,-2296.17 ccw(c-1075.84,-2303.84) -1075.84,-2293 ccw(c-1075.84,-2282.16) v2@-1068.17,-2289.83
  Bottom Layer w11.02: v2(-1348,-3535) -692,-3535 -663,-3506 v2(-663,-3423) ; v2@-1344.83,-3538.17 cw(c-1337.16,-3545.84) -1337.16,-3535 cw(c-1337.16,-3524.16) v2@-1344.83,-3531.83 ; v2@-666.17,-3426.17 cw(c-673.84,-3433.84) -663,-3433.84 cw(c-652.16,-3433.84) v2@-659.83,-3426.17
INH: P8.15 R29.2 R31.1 | length 7337.8
  Top Layer w11.02: v2@-4050.49,-210.38 -4050.18,-210.07 R29.2@-3995.98,-210.07 ; v2@-4045.31,-213.55 cw(c-4036.91,-221.95) -4036.91,-210.07 ; v2@-4045.31,-207.2 ccw(c-4038.39,-200.28) -4038.39,-210.07 ; v2@-4044.49,-210.07 cw(c-4044.49,-259.38) R29.2@-4009.62,-224.51 ; v2@-4043,-210.07 ccw(c-4043,-162.86) R29.2@-4009.62,-196.24 ; v2@-3981.92,-1146.5 -3981.61,-1146.19 R31.1@-3927.41,-1146.19 ; v2@-3976.75,-1149.67 cw(c-3968.34,-1158.08) -3968.34,-1146.19 ; v2@-3976.75,-1143.33 ccw(c-3969.83,-1136.41) -3969.83,-1146.19 ; v2@-3975.92,-1146.19 cw(c-3975.92,-1195.5) R31.1@-3941.06,-1160.63 ; v2@-3974.44,-1146.19 ccw(c-3974.44,-1098.99) R31.1@-3941.06,-1132.37 ; P8.15@-619.59,-3452.76 ccw(c-635.05,-3437.31) -613.19,-3437.31 ccw(c-591.33,-3437.31) P8.15@-606.79,-3452.76 ; v2@-616.17,-3426.17 cw(c-623.38,-3433.38) -613.19,-3433.38 ; P8.15@-613.19,-3491.84 -613.19,-3423.19 v2(-613,-3423) ; -613.19,-3434.29 cw(c-601.71,-3434.29) v2@-609.83,-3426.17
  MidLayer2 w11.02: v2@-4051.66,-213.55 cw(c-4060.5,-222.39) -4048,-222.39 ; v2(-4048.49,-210.38) -4048,-210.87 -4048,-1078.42 v2(-3979.92,-1146.5) ; v2@-3984.41,-1146.5 ccw(c-3995.25,-1146.5) -3987.58,-1138.84 ccw(c-3979.92,-1131.18) v2@-3979.92,-1142.01 ; v2@-681.17,-2693.17 cw(c-688.84,-2700.84) -678,-2700.84 cw(c-667.16,-2700.84) v2@-674.83,-2693.17 ; v2(-678,-2690) -678,-3358 v2(-613,-3423) ; v2@-617.49,-3423 ccw(c-628.32,-3423) -620.66,-3415.34 ccw(c-613,-3407.68) v2@-613,-3418.51
  Bottom Layer w11.02: v2(-4048.49,-210.38) -3504.38,-210.38 -3465,-171 -3147,-171 -3097,-221 -3097,-278 -3097,-1370 -1807.89,-2659.11 -708.89,-2659.11 v2(-678,-2690) ; v2@-4045.31,-213.55 cw(c-4037.65,-221.21) -4037.65,-210.38 cw(c-4037.65,-199.54) v2@-4045.31,-207.2 ; v2@-682.49,-2690 ccw(c-693.32,-2690) -685.66,-2682.34 ccw(c-678,-2674.68) v2@-678,-2685.51
NetC1_1: C1.1 D1.2 F1.2 L3.2 | length 1279.9
  Top Layer w100: F1.2@-3060,-2721.35 -3060,-2576 -3193,-2443 -3193,-2197.04 L3.2@-3058.96,-2063 -3058.96,-1558.65 C1.1@-3054.31,-1554
NetC4_1: C4.1 C19.1 U10.6 | length 498.5
  Top Layer w11.02: C4.1@420.69,-1169.69 C19.1@521.69,-1169.69 587.31,-1169.69 v2(588,-1169) ; U10.6@523.36,-988 v2(588,-988) ; U10.6@559.31,-992.45 cw(c570.07,-1003.21) 570.07,-988 cw(c570.07,-972.79) U10.6@559.31,-983.55 ; 575.49,-1169.69 ccw(c575.49,-1156.49) v2@584.83,-1165.83 ; v2@584.83,-991.17 ccw(c577.16,-998.84) 577.16,-988 ccw(c577.16,-977.16) v2@584.83,-984.83
  MidLayer2 w11.02: v2@584.83,-1165.83 ccw(c577.16,-1158.16) 588,-1158.16 ccw(c598.84,-1158.16) v2@591.17,-1165.83 ; v2@584.83,-991.17 cw(c577.16,-998.84) 588,-998.84 cw(c598.84,-998.84) v2@591.17,-991.17 ; v2(588,-1169) v2(588,-988)
NetC17_1: C17.1 U10.1 | length 276.1
  Top Layer w20: U10.1@318.64,-888 318.64,-879.36 362.69,-835.31 ; U10.1@333.2,-894.64 cw(c365.96,-881.8) 341.08,-856.92 ; C17.1@351.73,-796.96 cw(c325.27,-823.42) 362.69,-823.42 cw(c400.11,-823.42) C17.1@373.65,-796.96 ; U10.1@351.82,-887.34 cw(c397.01,-869.63) 362.69,-835.31 ; C17.1@362.69,-786 362.69,-835.31
NetC17_2: C17.2 D4.3 L2.1 U10.8
NetC19_2: C19.2 R20.2 | length 95.9
  Top Layer w11.02: R20.2@521.31,-1352 521.69,-1351.61 C19.2@521.69,-1256.31
NetC22_1: C22.1 L3.1 P12.1
NetC23_1: C23.1 U10.4 | length 155.7
  Top Layer w11.02: U10.4@314.18,-1042.45 cw(c303.43,-1053.21) 318.64,-1053.21 cw(c333.85,-1053.21) U10.4@323.09,-1042.45 ; U10.4@318.64,-1038 318.64,-1169.33 C23.1@319,-1169.69
NetD3_1: D3.1 L1.2 U9.1
NetD6_2: D6.2 R23.1 | length 99
  Top Layer w11.02: D6.2@-1508.97,-2495.18 R23.1@-1508.97,-2396.18
NetLS1_1: LS1.1 Q1.3 | length 321
  Top Layer w23.62: Q1.3@365.02,-2291.07 618.78,-2291.07 LS1.1@618.82,-2291.03 ; 575.95,-2291.07 ccw(c575.95,-2248.17) LS1.1@606.29,-2278.51 ; 576.14,-2291.07 cw(c576.14,-2333.71) LS1.1@606.29,-2303.56
NetP1_1: P1.1 U1.6 | length 2341.3
  Top Layer w50: v1(-2929,-3407) U1.6@-2834.67,-3407
  MidLayer2 w50: P1.1@-4169.99,-2345.27 -3186.73,-2345.27 -2858,-2674 -2858,-3061.54 -2973,-3176.54 -2973,-3363 v1(-2929,-3407)
NetP1_6: P1.6 U1.8 | length 2303.5
  Top Layer w50: v1(-2835,-3579) -2834.67,-3578.67 U1.8@-2834.67,-3507
  MidLayer2 w50: P1.6@-4169.99,-2738.97 -4042.96,-2866 -3359,-2866 -3276,-2949 -3276,-3111 -3379,-3214 -3380,-3214 -3431,-3265 -3431,-3510 -3362,-3579 v1(-2835,-3579)
NetP3_1: P3.1 U2.6 | length 3304.4
  Top Layer w50: v1(-2359,-3406) -2357,-3408 U2.6@-2273.67,-3408
  MidLayer2 w50: P3.1@-4175.19,-1802.77 -4096.23,-1802.77 -4028.47,-1735 -2866,-1735 -2474,-2127 -2474,-3291 v1(-2359,-3406)
NetP3_6: P3.6 U2.8 | length 3126.9
  Top Layer w50: v1(-2397,-3539) -2376,-3539 -2345,-3508 U2.8@-2273.67,-3508
  MidLayer2 w50: P3.6@-4175.19,-2098.04 -4090.23,-2183 -2702,-2183 -2595,-2290 -2595,-3341 v1(-2397,-3539)
NetP4_2: P4.2 R36.2 U17.2 | length 3375
  Top Layer w15: R36.2@-1162.69,-2859 -1112,-2859 -1097,-2844 U17.2@-1037.11,-2844 -986.15,-2844 -958,-2872.15 -958,-3135 -996,-3173 v2(-1054,-3173) ; R36.2@-1149.97,-2871.73 cw(c-1119.24,-2902.46) -1119.24,-2859 cw(c-1119.24,-2815.54) R36.2@-1149.97,-2846.27
  Bottom Layer w15: P4.2@-3578.2,-3383.07 -3530.12,-3335 -3283,-3335 -3164.3,-3453.7 -2124.7,-3453.7 -1844,-3173 v2(-1054,-3173)
NetP7_1: P7.1 U5.6 | length 2012.5
  Top Layer w50: v1(-3405,-2983) -3330.71,-3057.29 -2623.29,-3057.29 -2519,-2953 -2379,-2953 -2347,-2985 U5.6@-2270.36,-2985
  MidLayer2 w50: P7.1@-4171.51,-2924.75 -4111.65,-2924.75 -4053.4,-2983 v1(-3405,-2983)
NetP7_6: P7.6 U5.8 | length 1997.8
  Top Layer w50: v1(-3413,-3134) -3402.11,-3123.11 -2378.11,-3123.11 -2340,-3085 U5.8@-2270.36,-3085
  MidLayer2 w50: P7.6@-4171.51,-3318.45 -4073.45,-3318.45 -3889,-3134 v1(-3413,-3134)
NetP13_1: P13.1 U11.4 U11.8 | length 941
  Top Layer w40: U11.4@-3701,-293 U11.8@-3279.74,-293 ccw(c-3279.74,-373.61) U11.8@-3338.65,-318.59 ; U11.8@-3461.11,-293 cw(c-3461.11,-373.11) U11.8@-3404.46,-316.46 ; U11.8@-3443.8,-293 ccw(c-3443.8,-240.2) U11.8@-3406.46,-277.54 ; U11.8@-3413.54,-277.54 ccw(c-3376.2,-240.2) U11.8@-3376.2,-293 ; U11.8@-3411.54,-316.46 cw(c-3354.89,-373.11) U11.8@-3354.89,-293 ; U11.8@-3392.94,-293 cw(c-3392.94,-379.94) U11.8@-3331.46,-318.46 ; U11.8@-3365.97,-293 ccw(c-3365.97,-247.03) U11.8@-3333.46,-279.54 ; U11.8@-3340.54,-279.54 ccw(c-3308.03,-247.03) U11.8@-3308.03,-293 ; U11.8@-3336.36,-293 cw(c-3336.36,-383.36) U11.8@-3272.46,-319.46 ; U11.8@-3304.56,-293 ccw(c-3304.56,-250.44) U11.8@-3274.46,-280.54
  other v1: -3148,-375 -3211,-374 -3273,-372 -3332,-371 -3405,-369 -3151,-326 -3214,-325 -3276,-323 -3335,-322 -3408,-320 -3153,-280 -3216,-279 -3278,-277 -3337,-276 -3410,-274 -3152,-233 -3215,-232 -3277,-230 -3336,-229 -3409,-227
NetP13_6: P13.6 U8.4 U8.8 | length 421.3
  Top Layer w30: U8.4@-3667,-1248 U8.8@-3245.74,-1248
  other v1: -3206,-1625 -3269,-1624 -3331,-1622 -3390,-1621 -3463,-1619 -3209,-1576 -3272,-1575 -3334,-1573 -3393,-1572 -3466,-1570 -3211,-1530 -3274,-1529 -3336,-1527 -3395,-1526 -3468,-1524 -3210,-1483 -3273,-1482 -3335,-1480 -3394,-1479 -3467,-1477
NetP17_2: P17.2 R33.2 U16.2 | length 3382.3
  Top Layer w11.02: R33.2@-1173.83,-3077.13 cw(c-1214.45,-3117.76) -1157,-3117.76 ; R33.2@-1166.03,-3069.34 cw(c-1187.84,-3091.14) -1157,-3091.14 ; v2@-1160.17,-3299.83 ccw(c-1167.84,-3292.16) -1157,-3292.16 ccw(c-1146.16,-3292.16) v2@-1153.83,-3299.83 ; v2@-1159.69,-3300.31 v2(-1157,-3303) -1157,-3065.69 R33.2@-1158.69,-3064 ; R33.2@-1159.69,-3063 R33.2@-1158.69,-3064 ; -1157,-3104.75 cw(c-1117.94,-3104.75) R33.2@-1145.56,-3077.13 ; R33.2@-1145.53,-3077.1 cw(c-1114,-3108.48) -1114,-3064 ; R33.2@-1144.53,-3049.98 ccw(c-1114,-3023.76) -1114,-3064 ; U16.2@-1067.12,-3062.45 ccw(c-1077.88,-3073.21) -1077.88,-3058 ccw(c-1077.88,-3042.79) U16.2@-1067.12,-3053.55 ; U16.2@-1035.11,-3058 -1108,-3058 -1114,-3064 ; R33.2@-1158.69,-3064 -1114,-3064
  Bottom Layer w11.02: P17.2@-3826.69,-3383.07 -3776.76,-3433 -3282,-3433 -3234.4,-3480.6 -1943.6,-3480.6 -1766,-3303 v2(-1157,-3303) ; v2@-1160.17,-3306.17 ccw(c-1167.84,-3313.84) -1167.84,-3303 ccw(c-1167.84,-3292.16) v2@-1160.17,-3299.83
NetQ1_1: Q1.1 R12.1 | length 112.4
  Top Layer w11.02: R12.1@186.12,-2255.07 265.2,-2255.07 Q1.1@266.6,-2253.67 ; 232.43,-2255.07 ccw(c232.43,-2230.33) Q1.1@249.92,-2247.83 ; 239.19,-2255.07 cw(c239.19,-2270.25) Q1.1@249.92,-2259.52
NetR1_2: R1.2 U17.1 | length 219.2
  Top Layer w11.02: R1.2@-1162.69,-2752 -1124,-2752 ; R1.2@-1146.39,-2763.57 cw(c-1124,-2779.45) -1124,-2752 ; R1.2@-1146.39,-2740.43 ccw(c-1124,-2724.55) -1124,-2752 ; U17.1@-1069.12,-2798.45 ccw(c-1079.88,-2809.21) -1079.88,-2794 ccw(c-1079.88,-2778.79) U17.1@-1069.12,-2789.55 ; U17.1@-1037.11,-2794 -1082,-2794 -1124,-2752
NetR3_2: R3.2 U1.7 | length 182.7
  Top Layer w30: R3.2@-3017.31,-3457.05 -3017.26,-3457 U1.7@-2834.67,-3457
NetR4_2: R4.2 U2.7 | length 202
  Top Layer w30: R4.2@-2448.31,-3455.05 -2445.35,-3458 U2.7@-2273.67,-3458 ; R4.2@-2422.8,-3448.25 ccw(c-2399.27,-3424.73) -2399.27,-3458
NetR5_2: R5.2 R6.1 U12.6 | length 469.7
  Top Layer w11.02: R6.1@185.31,-2345 185.31,-2438 R5.2@184.31,-2439 237,-2491.69 237,-2553 333.81,-2649.81 U12.6@333.81,-2713.58 ; U12.6@326.57,-2682.72 ccw(c309.1,-2665.25) 333.81,-2665.25 ccw(c358.52,-2665.25) U12.6@341.05,-2682.72
NetR11_2: R11.2 U5.7 | length 193.2
  Top Layer w19.68: R11.2@-2430,-3030.05 R11.2@-2425.05,-3035
  Top Layer w30: R11.2@-2425.05,-3035 U5.7@-2270.36,-3035 ; R11.2@-2398.49,-3023.25 ccw(c-2370.13,-2994.9) -2370.13,-3035